# Altium PCB Board.PcbDoc
Units mil, origin at the board's own origin, x right, y up, seen from the top; angles counter-clockwise.
Board outline 3935 x 3937.01 mil, 2 copper layers (Top Layer, Bottom Layer); 31 components, 0 nets, 136 pads, 37 vias.
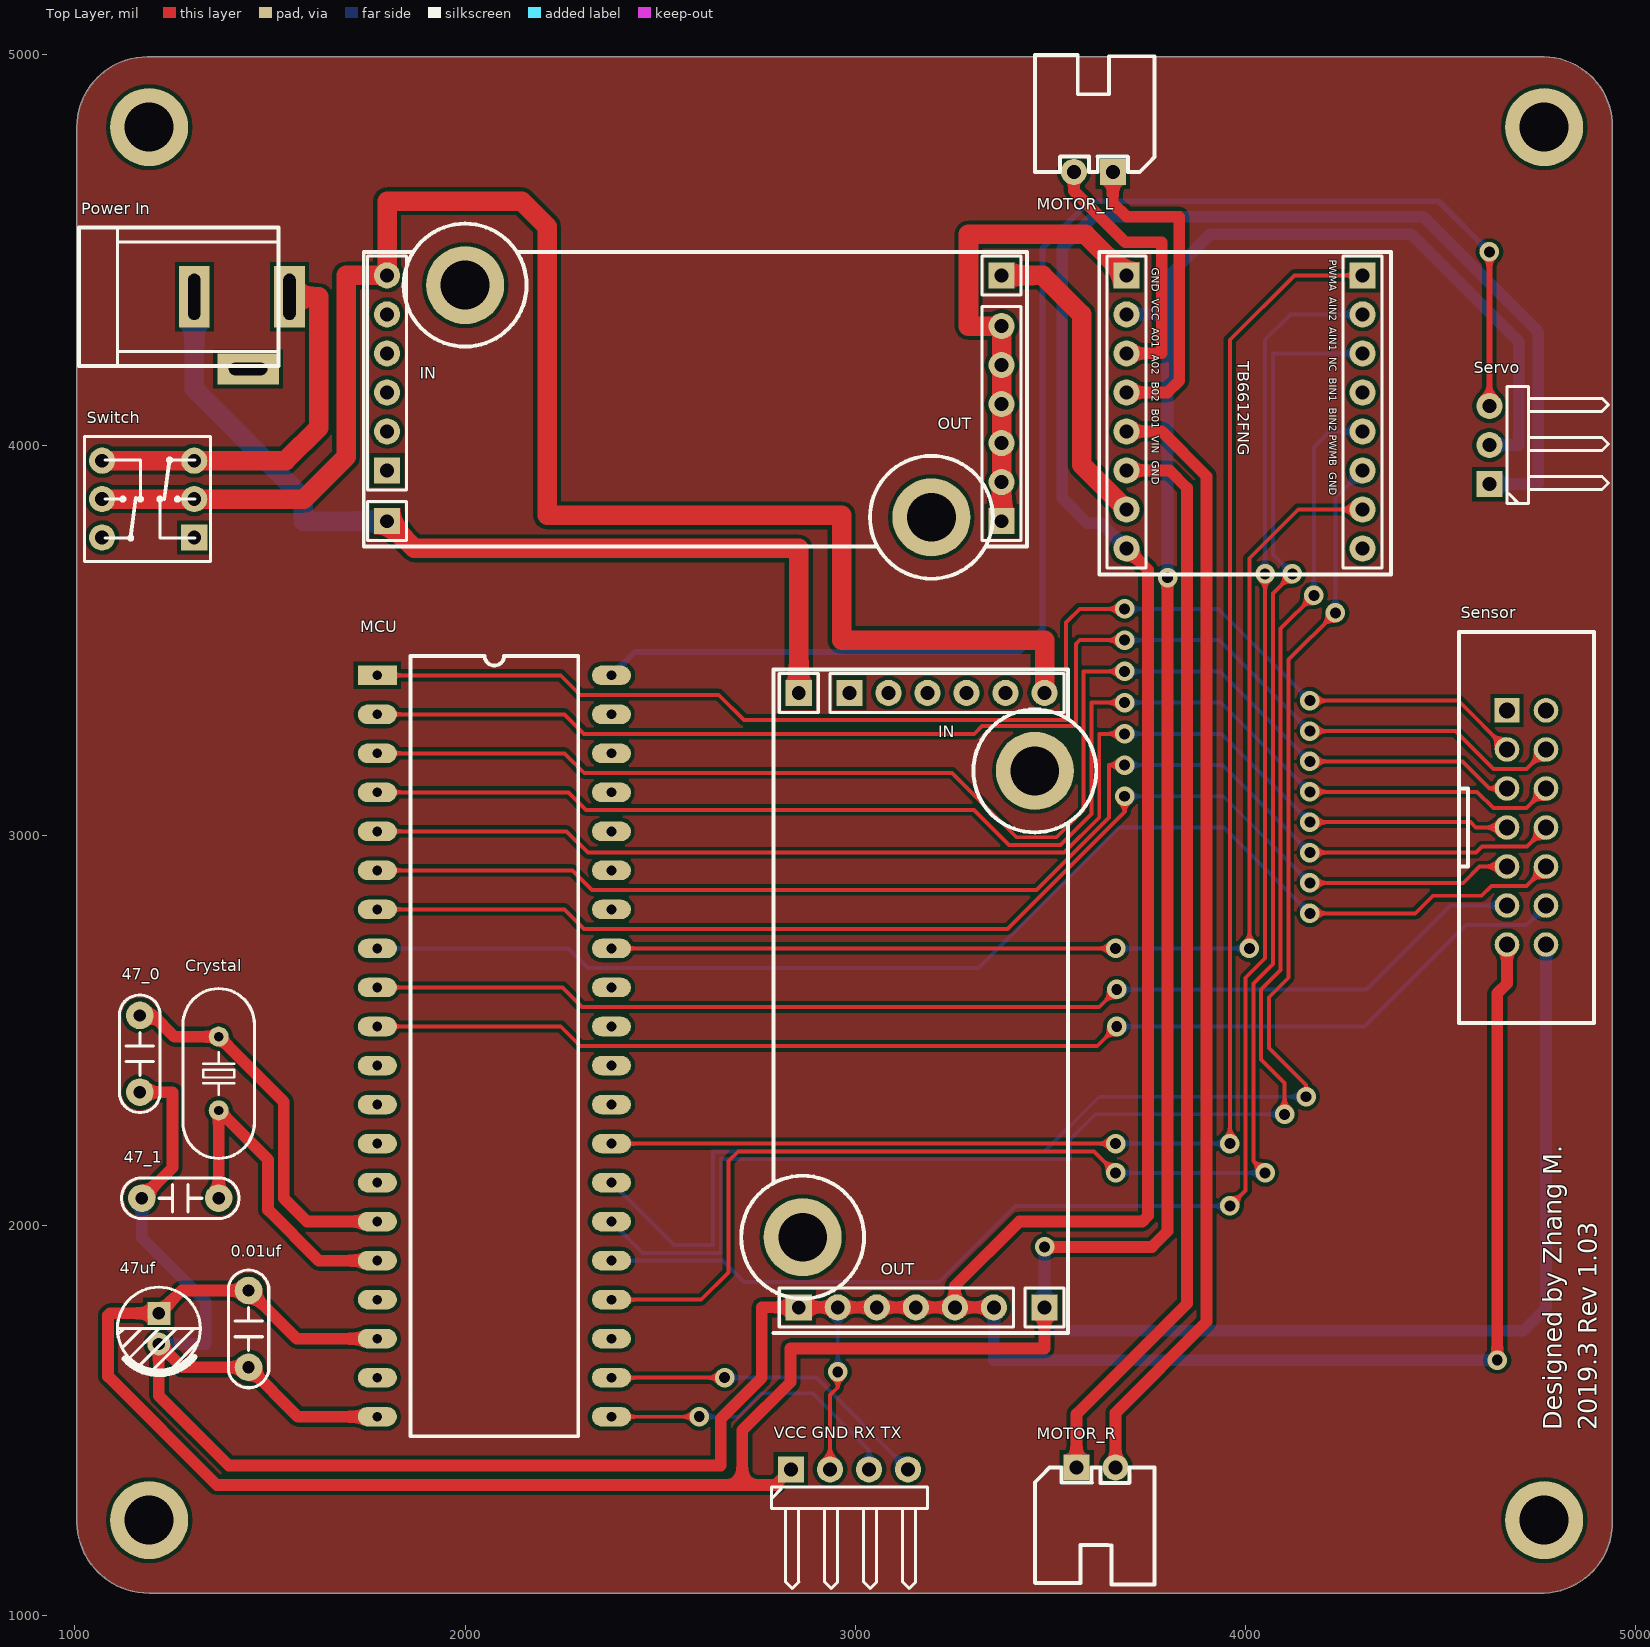
[diagram p0: Top Layer view]
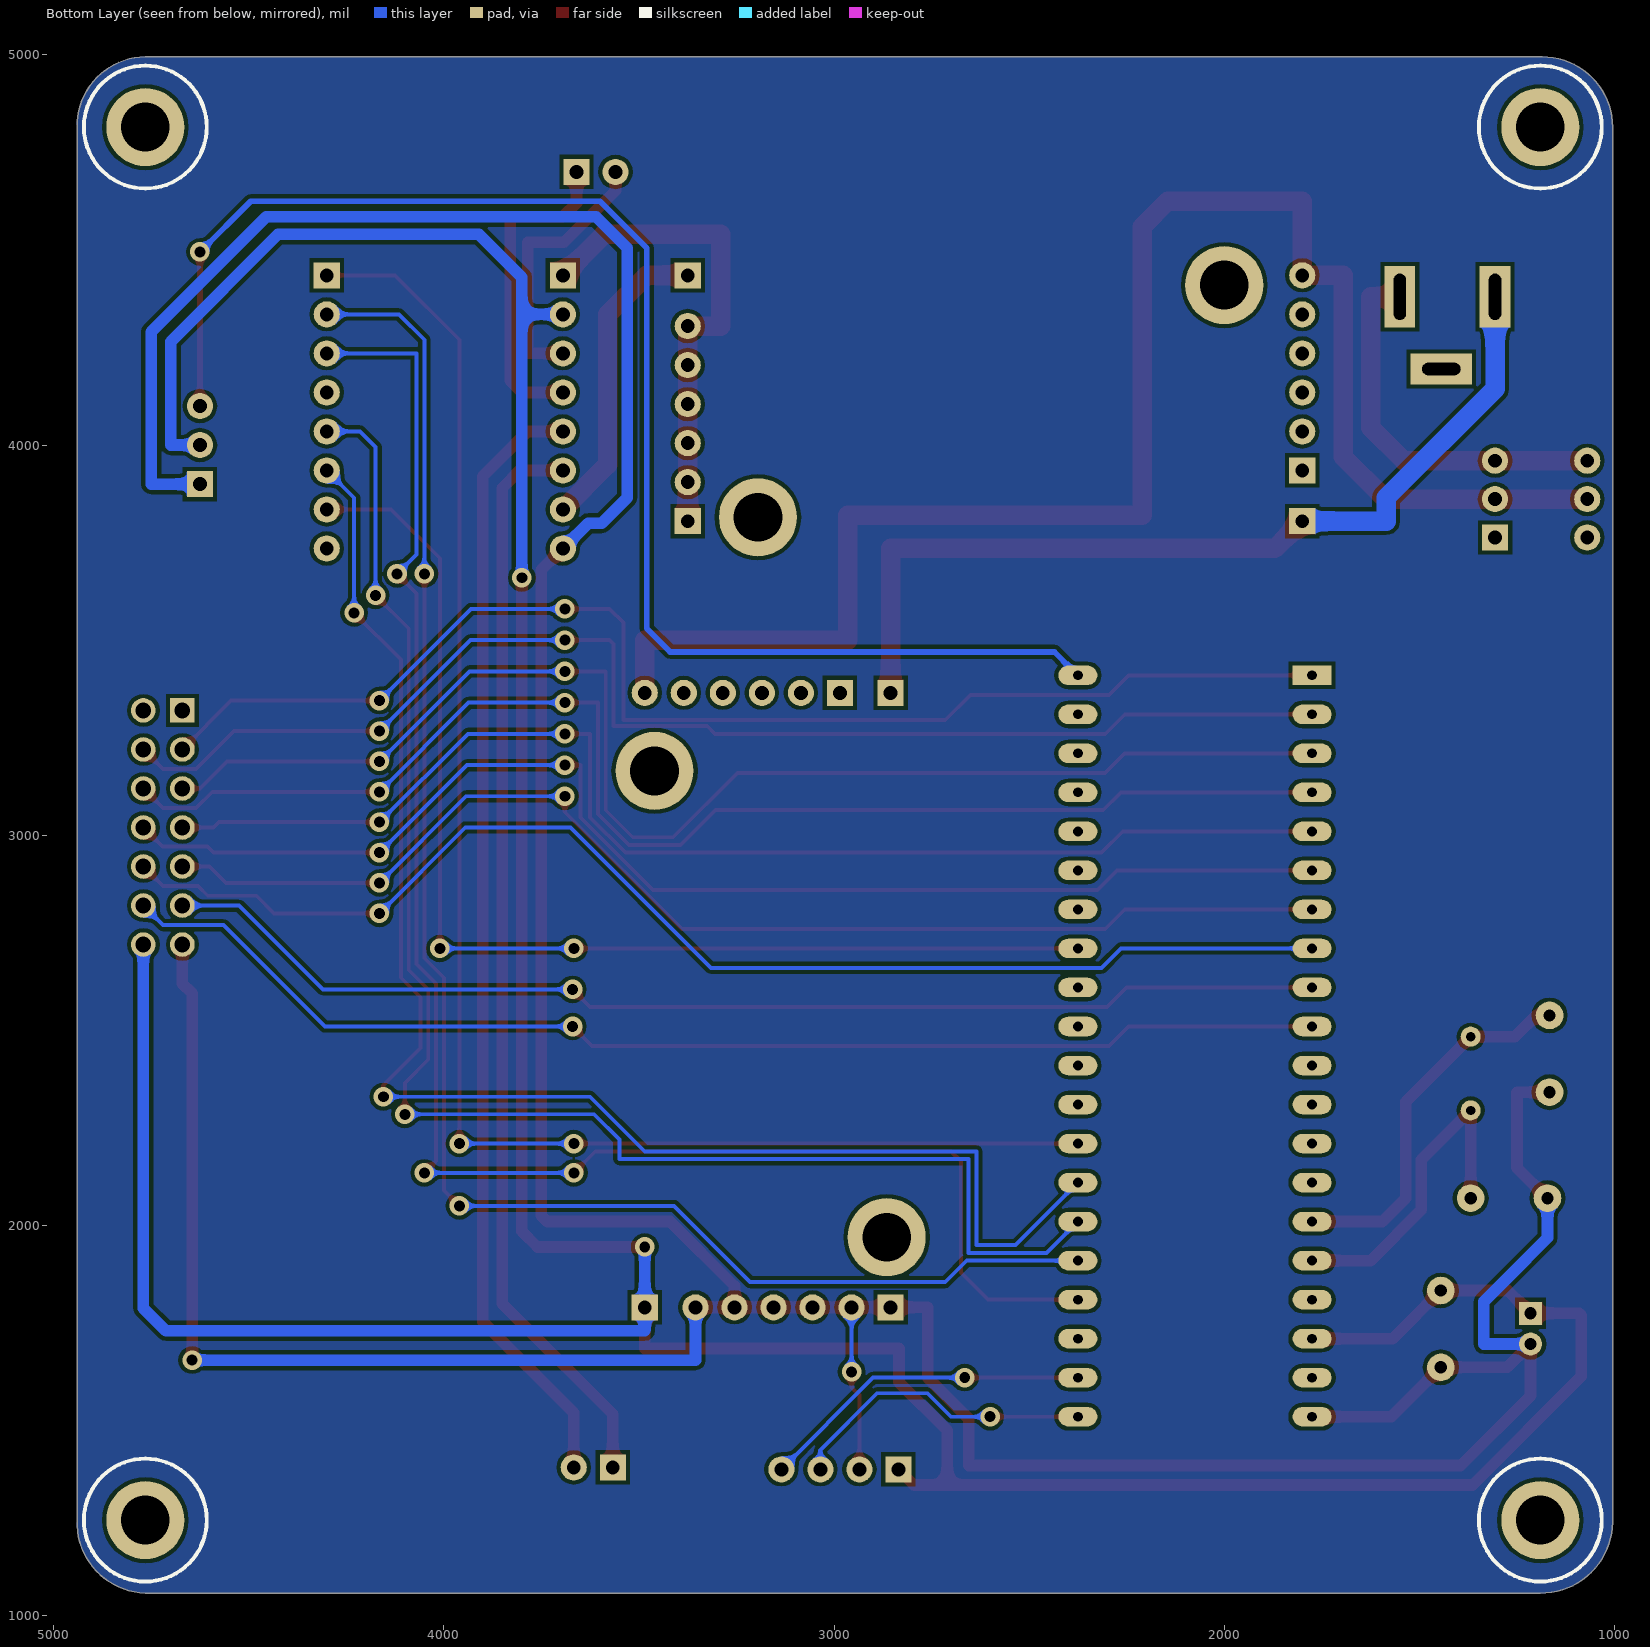
[diagram p1: Bottom Layer view, seen from below]

## Layer stack, top to bottom
Top Solder: solder mask 0.4, Solder Resist, Dk 3.5
Top Layer: signal copper 1.4
Dielectric 1: dielectric 12.6, FR-4, Dk 4.8
Bottom Layer: signal copper 1.4
Bottom Solder: solder mask 0.4, Solder Resist, Dk 3.5

## Board outline
1005,1240 1005,4815 cw(c1185,4815) 1185,4995 4765,4995 cw(c4762.5,4817.5) 4940,4815 4940,1245 cw(c4759,1239) 4765,1057.99 1190,1057.99 cw(c1188.5,1241.5)

## Design rules (kind name [scope] priority, off if disabled: settings)
Clearance [All] p1: gap=10 ignorepadtopadclearanceinfootprint=FALSE except(0: Arc-Hole Track-Hole SMDPad-Hole THPad-Hole Via-Hole Fill-Hole Poly-Hole Region-Hole Text-Hole)
PolygonConnect [All] p1: connectstyle=Relief reliefconductorwidth=10 reliefentries=4 polygonreliefangle="90 Angle" airgapwidth=10
RoutingVias [All] p1: holewidth=28 width=50 viastyle="Through Hole" minholewidth=28 minwidth=50 maxholewidth=28 maxwidth=50
SolderMaskExpansion [All] p1: expansion=4
Width [All] p1: maxlimit=100 minlimit=10 preferedwidth=10 minimp=50.000000 maximp=50.000000 favimp=50.000000
30 further rules are at their usual default settings.

## Components (designator, comment, footprint, x,y, rotation, side; value= is the part's Value field where it differs from the comment)
0.01uf "Comment" "CY 5*7*2.5" 1445,1735 r270 top
47_0 "Comment" "CY 5*7*2.5" 1166.34,2440 r270 top
47_1 "Comment" "CY 5*7*2.5" 1270,2070 r180 top
47uf "Comment" "CS 2.0*5*8 - R" 1215,1735.63 r90 top
Crystal "Comment" "OSC HC-49S" 1368.43,2389.49 r90 top
IN "Comment" HDR2.54-M-LI-6P 3235,3365 r0 top
IN "Comment" HDR2.54-M-LI-6P 1800,4185 r90 top
MCU "Comment" DIP40 1775,3410 r0 top
MOTOR_L "Comment" XH2.54-WI-2P 3610,4700 r180 top
MOTOR_R "Comment" XH2.54-WI-2P 3616.93,1380 r0 top
OUT "Comment" HDR2.54-M-LI-6P 3105,1790.2 r0 top
OUT "Comment" HDR2.54-M-LI-6P 3374.8,4055 r90 top
"Power In" "Comment" DC-005 1305.91,4380 r180 top
Sensor "Comment" DC-2.54-L-Z-14P 4720,3020 r270 top
Servo "Comment" HDR2.54-WI-3P 4625,4000 r90 top
Switch "Comment" "KFT DIP-8X8" 1187.8,3861.57 r90 top
"VCC GND RX TX" "Comment" HDR2.54-WI-4P 2985,1375 r0 top
? "Comment" M3x8+6_L 3460,3165 r180 top
? "Comment" HDR2.54-M-LI-1P 2855,3365 r0 top
? "Comment" HDR2.54-M-LI-1P 3485,1790.2 r0 top
? "Comment" M3x8+6_L 2865,1970 r0 top
? "Comment" M3x8+6_L 3195,3815 r90 top
? "Comment" HDR2.54-M-LI-1P 3374.8,4435 r90 top
? "Comment" HDR2.54-M-LI-1P 1800,3805 r90 top
? "Comment" HDR2.54-M-LI-8P 4300,4085 r270 top
? "Comment" HDR2.54-M-LI-8P 3695,4085 r270 top
? "Comment" M3x8+6_L 2000,4410 r270 top
? "Comment" M3x20+6_L 1190,1245 r180 bottom
? "Comment" M3x20+6_L 4765,1245 r180 bottom
? "Comment" M3x20+6_L 4765,4815 r180 bottom
? "Comment" M3x20+6_L 1190,4815 r180 bottom

## Footprints (in the part's own frame and the unit in brackets; to place one, negate y for a bottom-side part, rotate by r counter-clockwise, add the part's x,y. Pads: shape width x height; smd on the part's side, far side on the other; paste and mask are expansions set on the pad)
"CS 2.0*5*8 - R" [mm] "脚距2mm , 直径5mm , 高8mm"
  rect 1.5x1.5 hole 0.8: 1(1,0)
  round 1.5 hole 0.8: 2(-1,0)
  silkscreen extent -2.96,-2.7 2.7,2.7, body extent -2.5,-2.5 2.5,2.5, height 8.02
"CY 5*7*2.5" [mm] "脚距5mm，直径7mm，厚2.5mm"
  round 1.8 hole 0.8: 1(-2.5,0) 2(2.5,0)
  silkscreen extent -3.83,-1.31 3.83,1.31, body extent -3.5,-1.25 3.5,1.25, height 7
DC-2.54-L-Z-14P [mm] "立式直插简牛插座，间距2.54（蒜米工坊）"
  rect 1.6x1.6 hole 1.02: 1(-7.62,-1.27)
  round 1.6 hole 1.02: 2(-7.62,1.27) 3(-5.08,-1.27) 4(-5.08,1.27) 5(-2.54,-1.27) 6(-2.54,1.27) 7(0,-1.27) 8(0,1.27) 9(2.54,-1.27) 10(2.54,1.27) 11(5.08,-1.27) 12(5.08,1.27) 13(7.62,-1.27) 14(7.62,1.27)
  silkscreen extent -12.72,-4.4 12.72,4.4, body extent -12.72,-4.4 12.71,4.7, height 8.8
DC-005 [mm] "5.5*2.1mm，DC30V,2.5A"
  rect 2x4 hole 0.8 slot 3 at 90 deg: 1(-6.2,0) 2(0,0)
  rect 4x2 hole 0.8 slot 2.5 at 0 deg: 3(-3.5,4.7)
  silkscreen extent -5.48,-4.5 7.5,4.5, body extent -6.55,-4.5 7.5,4.8, height 11.2
DIP40 [mil] "40脚300mil直插集成电路（蒜米工坊）"
  rect 100x50 hole 25: 1(0,0)
  oval 100x50 hole 25: 2(0,-100) 3(0,-200) 4(0,-300) 5(0,-400) 6(0,-500) 7(0,-600) 8(0,-700) 9(0,-800) 10(0,-900) 11(0,-1000) 12(0,-1100) 13(0,-1200) 14(0,-1300) 15(0,-1400) 16(0,-1500) 17(0,-1600) 18(0,-1700) 19(0,-1800) 20(0,-1900) 21(600,-1900) 22(600,-1800) 23(600,-1700) 24(600,-1600) 25(600,-1500) 26(600,-1400) 27(600,-1300) 28(600,-1200) 29(600,-1100) 30(600,-1000) 31(600,-900) 32(600,-800) 33(600,-700) 34(600,-600) 35(600,-500) 36(600,-400) 37(600,-300) 38(600,-200) 39(600,-100) 40(600,0)
  silkscreen extent 85,-1950 515,50, body extent -5,-1985 605,80, height 224
HDR2.54-M-LI-1P [mm] "排母，1脚"
  rect 1.7x1.7 hole 0.9: 1(0,0)
  silkscreen extent -1.27,-1.27 1.27,1.27, body extent -1.27,-1.27 1.27,1.27, height 8.5
HDR2.54-M-LI-6P [mm] "排母，6脚"
  rect 1.7x1.7 hole 0.9: 1(-6.35,0)
  round 1.7 hole 0.9: 2(-3.81,0) 3(-1.27,0) 4(1.27,0) 5(3.81,0) 6(6.35,0)
  silkscreen extent -7.62,-1.27 7.62,1.27, body extent -7.62,-1.27 7.62,1.27, height 8.5
HDR2.54-M-LI-8P [mm] "排母，8脚"
  rect 1.7x1.7 hole 0.9: 1(-8.89,0)
  round 1.7 hole 0.9: 2(-6.35,0) 3(-3.81,0) 4(-1.27,0) 5(1.27,0) 6(3.81,0) 7(6.35,0) 8(8.89,0)
  silkscreen extent -10.16,-1.27 10.16,1.27, body extent -10.16,-1.27 10.16,1.27, height 8.5
HDR2.54-WI-3P [mm] "弯脚排针，3脚"
  rect 1.7x1.7 hole 0.9: 1(-2.54,0)
  round 1.7 hole 0.9: 2(0,0) 3(2.54,0)
  silkscreen extent -3.81,-7.76 3.81,-1.14, body extent -3.81,-7.77 3.81,1.27, height 4.85
HDR2.54-WI-4P [mm] "弯脚排针，4脚"
  rect 1.7x1.7 hole 0.9: 1(-3.81,0)
  round 1.7 hole 0.9: 2(-1.27,0) 3(1.27,0) 4(3.81,0)
  silkscreen extent -5.08,-7.76 5.08,-1.14, body extent -5.08,-7.77 5.08,1.27, height 4.85
"KFT DIP-8X8" [mm] "自锁开关，规格：8*8mm"
  rect 1.7x1.7 hole 0.9: 1(-2.5,-3)
  round 1.7 hole 0.9: 2(0,-3) 3(2.5,-3) 4(2.5,3) 5(0,3) 6(-2.5,3)
  silkscreen extent -4.06,-4.06 4.06,4.15, body extent -3.95,-3.95 4.05,4.05, height 13.1
M3x8+6_L [mil] "M3铜柱，长：8mm，螺纹长：6mm"
  round 200 hole 125: 1(0,0)
  silkscreen extent -157,-157 157,157, body extent -106,-93 106,93, height 317
M3x20+6_L [mil] "M3铜柱，长：20mm，螺纹长：6mm"
  round 200 hole 125: 1(0,0)
  silkscreen extent -157,-157 157,157, body extent -106,-93 106,93, height 789
"OSC HC-49S" [mm]
  round 1.3 hole 0.6: 1(-2.4,0) 2(2.4,0)
  silkscreen extent -5.52,-2.32 5.52,2.33, body extent -5.52,-2.32 5.53,2.33, height 4.13
XH2.54-WI-2P [mm] "接插件，2P"
  rect 1.7x1.7 hole 0.9: 1(-1.27,0)
  round 1.7 hole 0.9: 2(1.27,0)
  silkscreen extent -3.99,-7.62 3.81,0, body extent -3.77,-7.35 3.77,0.35, height 5.73

## Via types
v1: diameter 50, hole 28, Top Layer to Bottom Layer, 37 vias

## Nets (pads, with @x,y where several pads share a name; then routed paths per layer and width w, separated by ;. In a path a pad name is that pad's centre, name@x,y a point inside that pad or via, vN(x,y) a via of type N, cw(c..) or ccw(c..) an arc to the next point about the centre after c; other vN are vias at no path point)
pads on no net: 0.01uf.1 0.01uf.2 47_0.1 47_0.2 47_1.1 47_1.2 47uf.1 47uf.2 "Power In.1" "Power In.2" "Power In.3" "VCC GND RX TX.1" "VCC GND RX TX.2" "VCC GND RX TX.3" "VCC GND RX TX.4" ?.1 ?.2 ?.3 ?.4 ?.5 ?.6 ?.7 ?.8 Crystal.1 Crystal.2 IN.1 IN.2 IN.3 IN.4 IN.5 IN.6 MCU.1 MCU.2 MCU.3 MCU.4 MCU.5 MCU.6 MCU.7 MCU.8 MCU.9 MCU.10 MCU.11 MCU.12 MCU.13 MCU.14 MCU.15 MCU.16 MCU.17 MCU.18 MCU.19 MCU.20 MCU.21 MCU.22 MCU.23 MCU.24 MCU.25 MCU.26 MCU.27 MCU.28 MCU.29 MCU.30 MCU.31 MCU.32 MCU.33 MCU.34 MCU.35 MCU.36 MCU.37 MCU.38 MCU.39 MCU.40 MOTOR_L.1 MOTOR_L.2 MOTOR_R.1 MOTOR_R.2 OUT.1 OUT.2 OUT.3 OUT.4 OUT.5 OUT.6 Sensor.1 Sensor.2 Sensor.3 Sensor.4 Sensor.5 Sensor.6 Sensor.7 Sensor.8 Sensor.9 Sensor.10 Sensor.11 Sensor.12 Sensor.13 Sensor.14 Servo.1 Servo.2 Servo.3 Switch.1 Switch.2 Switch.3 Switch.4 Switch.5 Switch.6
copper on no net: | length 103845.3
  Top Layer w10: 1775,2510 2245,2510 2295,2460 3620,2460 v1(3670,2510) ; 1775,2610 2230,2610 2250,2610 2300,2560 3625,2560 v1(3670,2605) ; 1775,2810 2255,2810 2305,2760 3390,2760 3690,3060 v1(3690,3100) ; 1775,2910 2275,2910 2325,2860 3464.32,2860 3650,3045.68 3650,3175 3650,3180 v1(3690,3180) ; 1775,3010 2260.16,3010 2314.44,2955.71 3534.7,2955.71 3625,3046.02 3625,3260 v1(3690,3260) ; 1775,3110 2265,3110 2310,3065 3303.84,3065 3393.84,2975 3525.57,2975 3605,3054.43 3605,3340 v1(3690,3340) ; 1775,3210 2255.16,3210 2305.16,3160 3247.92,3160 3412.92,2995 3515.81,2995 3585,3064.19 3585,3420 v1(3690,3420) ; 1775,3310 2255,3310 2305,3260 3304.65,3260 3324.95,3280.29 3565,3280.29 3565,3490 3575,3500 v1(3690,3500) ; 1775,3410 2245,3410 2295,3360 2650,3360 2715,3295 3540,3295 3540,3545 3575,3580 v1(3690,3580) ; 2375,1510 v1(2600,1510) ; 2375,1610 v1(2665,1610) ; 2375,1810 2605,1810 2675,1880 2675,2075 2675,2165 2700,2190 3611.93,2190 v1(3666.93,2135) ; 2375,2210 v1(3666.93,2210) ; 2375,2710 v1(3666.93,2710) ; 2935,1375 2935,1565.16 2955,1585.16 v1(2955,1625) ; v1(3960,2050) 4000,2090 4000,2635 4050,2685 4050,2755 v1(4050,3670) ; v1(3960,2210) 3960,4270 4125,4435 4300,4435 ; v1(4010,2710) 4010,3710 4135,3835 4300,3835 ; v1(4050,2135) 4020,2165 4020,2620 4070,2670 4070,3620 v1(4120,3670) ; v1(4100,2285) 4100,2365 4040,2425 4040,2605 4090,2655 4090,3530 v1(4175,3615) ; v1(4155,2330) 4155,2360 4115,2400 4060,2455 4060,2585 4110,2635 4110,3450 v1(4230,3570) ; v1(4165,2800) 4435,2800 4480,2845 4605,2845 4630,2870 4720,2870 4770,2920 ; v1(4165,2877.86) 4557.86,2877.86 4600,2920 4670,2920 ; v1(4165,2955.71) 4590.71,2955.71 4606.01,2971.01 4721.01,2971.01 4770,3020 ; v1(4165,3033.57) 4576.43,3033.57 4590,3020 4670,3020 ; v1(4165,3111.43) 4593.57,3111.43 4635,3070 4720,3070 4770,3120 ; v1(4165,3189.29) 4535.71,3189.29 4555.71,3189.29 4625,3120 4670,3120 ; v1(4165,3267.14) 4537.86,3267.14 4635,3170 4720,3170 4770,3220 ; v1(4165,3345) 4545,3345 4670,3220
  Top Layer w15: 4625,4100 v1(4625,4495)
  Top Layer w30: 1166.34,2341.57 1250,2341.57 1250,2148.43 1171.57,2070 ; 1166.34,2538.43 1200.55,2538.43 1255,2483.98 1368.43,2483.98 1535,2317.4 1535,2070 1595,2010 1775,2010 ; 1368.43,2070 1368.43,2295 1495,2168.43 1495,2039.84 1624.84,1910 1775,1910 ; 1775,1510 1571.57,1510 1445,1636.57 1274.68,1636.57 1215,1696.26 1215,1580 1215,1563.98 1393.98,1385 2655,1385 2655,1505 2760,1610 2760,1765.35 2760,1790.2 3355,1790.2 ; 1775,1710 1568.43,1710 1445,1833.43 1273.43,1833.43 1215,1775 1090,1775 1085,1770 1085,1625 1085,1613.19 1363.19,1335 2710,1335 ; 2835,1375 2795,1335 2710,1335 ; 3255,1790.2 3255,1845 3420,2010 3460,2010 3735,2010 3750,2025 3750,3680 3695,3735 ; 3484.84,1785 3484.84,1685 2833.78,1685 2833.78,1598.78 2710,1475 2710,1335 ; v1(3485,1945) 3760,1945 3800,1985 v1(3800,3660) ; 3560,4700 3560,4652.03 3692.03,4520 3785,4520 3785,4235 3695,4235 ; 3566.93,1380 3566.93,1516.93 3850,1800 3850,3890 3805,3935 3695,3935 ; 3660,4700 3660,4620 3695,4585 3830,4585 3830,4165 3800,4135 3695,4135 ; 3666.93,1380 3666.93,1520 3900,1753.07 3900,3920 3785,4035 3695,4035 ; v1(4645,1655) 4645,2595 4670,2620 4670,2710
  Top Layer w50: 1069.69,3960 1540,3960 1625,4045 1625,4380 1550,4380 ; 1070,3861.57 1199.14,3861.57 1457.43,3861.57 1586.57,3861.57 1695,3970 1695,4435 1800.16,4435 1800.16,4625.16 2144.84,4625.16 2210,4560 2210,4190 2210,3820 2965,3820 2965,3500 3485,3500 3485,3365.16 ; 1800,3805 1870,3735 2020,3735 2150,3735 2855,3735 2855,3365 ; 3374.8,3805 3374.8,4305 3290,4305 3290,4540 3590,4540 3695,4435 ; 3374.8,4435 3480,4435 3580,4335 3580,3950 3695,3835
  Bottom Layer w10: 1775,2710 2265,2710 2315,2660 3315.44,2660 3675.44,3020 3690,3020 3945,3020 v1(4165,2800) ; 2375,1910 2660,1910 2715,1855 3215,1855 3410,2050 v1@3945,2050 ; 2375,2010 2455,1930 2655,1930 2655,2170 3550,2170 3550,2220 3615,2285 3666.93,2285 v1(4100,2285) ; 2375,2110 2535,1950 2635,1950 2635,2190 3485,2190 3625,2330 v1(4155,2330) ; v1(2600,1510) 2700,1510 2760,1570 2890,1570 3035,1425 3035,1375 ; v1(2665,1610) 2860,1610 2900,1610 3135,1375 ; v1(2955,1625) 2955,1790.2 ; v1(3666.93,2135) v1(4050,2135) ; v1(3666.93,2210) v1(3960,2210) ; v1(3666.93,2710) v1(4010,2710) ; v1(3670,2510) 4065,2510 4305,2510 4565,2770 4720,2770 4770,2820 ; v1(3670,2605) 4095,2605 4310,2605 4525,2820 4670,2820 ; v1(3690,3100) 3942.86,3100 v1(4165,2877.86) ; v1(3690,3180) 3940.71,3180 v1(4165,2955.71) ; v1(3690,3260) 3938.57,3260 v1(4165,3033.57) ; v1(3690,3340) 3936.43,3340 v1(4165,3111.43) ; v1(3690,3420) 3934.29,3420 v1(4165,3189.29) ; v1(3690,3500) 3932.14,3500 v1(4165,3267.14) ; v1(3690,3580) 3930,3580 v1(4165,3345) ; v1(4050,3670) 4050,4270 4115,4335 4300,4335 ; v1(4120,3670) 4070,3720 4070,4235 4300,4235 ; v1(4175,3615) 4175,3995 4210,4030 4215,4035 4300,4035 ; v1(4230,3570) 4230,3865 4300,3935
  Bottom Layer w15: 2375,3410 2435,3470 3420,3470 3480,3530 3480,4505 3600,4625 4495,4625 v1(4625,4495)
  Bottom Layer w30: 1171.57,2070 1171.57,1968.43 1275,1865 1335,1805 1335,1696.26 1215,1696.26 ; 3355,1790.2 3355,1655 4530,1655 v1(4645,1655) ; v1@3484.84,1944.84 3484.84,1730 3595,1730 4570,1730 4680,1730 4712.26,1730 4770,1787.74 4770,2720 ; 3695,3735 3630,3800 3595,3800 3530,3865 3530,4505 3610,4585 4455,4585 4750,4290 4750,3900 4625,3900 ; 3695,4335 3800,4335 ; v1(3800,3660) 3800,3840 3800,4335 ; 4625,4000 4700,4000 4700,4265 4425,4540 3910,4540 3800,4430 3800,4335
  Bottom Layer w50: 1305.91,4380 1305.91,4144.09 1585,3865 1585,3805 1800,3805

## Polygon pours and split planes (outlines as drawn)
no net on Bottom Layer "Top Layer-No Net1" (solid, pour order 7): 1005,1240 1005,4815 cw(c1185,4815) 1185,4995 4765,4995 cw(c4762.5,4817.5) 4940,4815 4940,1245 cw(c4759,1239) 4765,1057.99 1190,1057.99 cw(c1188.5,1241.5)
no net on Top Layer "Top Layer-No Net" (solid, pour order 6): 1005,1240 1005,4815 cw(c1185,4815) 1185,4995 4765,4995 cw(c4762.5,4817.5) 4940,4815 4940,1245 cw(c4759,1239) 4765,1057.99 1190,1057.99 cw(c1188.5,1241.5)

## Silkscreen, mask and mechanical layers (free items; w line width, h text height)
Top Overlay:
  lines w10: 1865,4495 1740.16,4495 1740.16,3740 3055,3740 ; 2135,4495 3440.16,4495 3440.16,3740 3335,3740 ; 2790,1724.84 3545,1724.84 3545,3030 ; 2790,2110 2790,3424.84 3545,3424.84 3545,3300 ; 3625,3668.23 4373.03,3668.23 4373.03,4495 3625,4495 3625,3668.23
  text "PWMA  AIN2  AIN1  NC  BIN1  BIN2 PWMB  GND" at 4215,4475 h19 r270
  text "GND  VCC  A01  A02  B02  B01  VIN  GND" at 3760,4455 h20 r270
  text "TB6612FNG" at 3980,4215 h30 r270
  text "Designed by Zhang M." at 4810,1475 h48 r90
  text "2019.3 Rev 1.03" at 4900,1475 h48 r90
Mechanical 1:
  the board outline again, w10